# EAGLE board Stepper_motor (EAGLE 9.6.2)
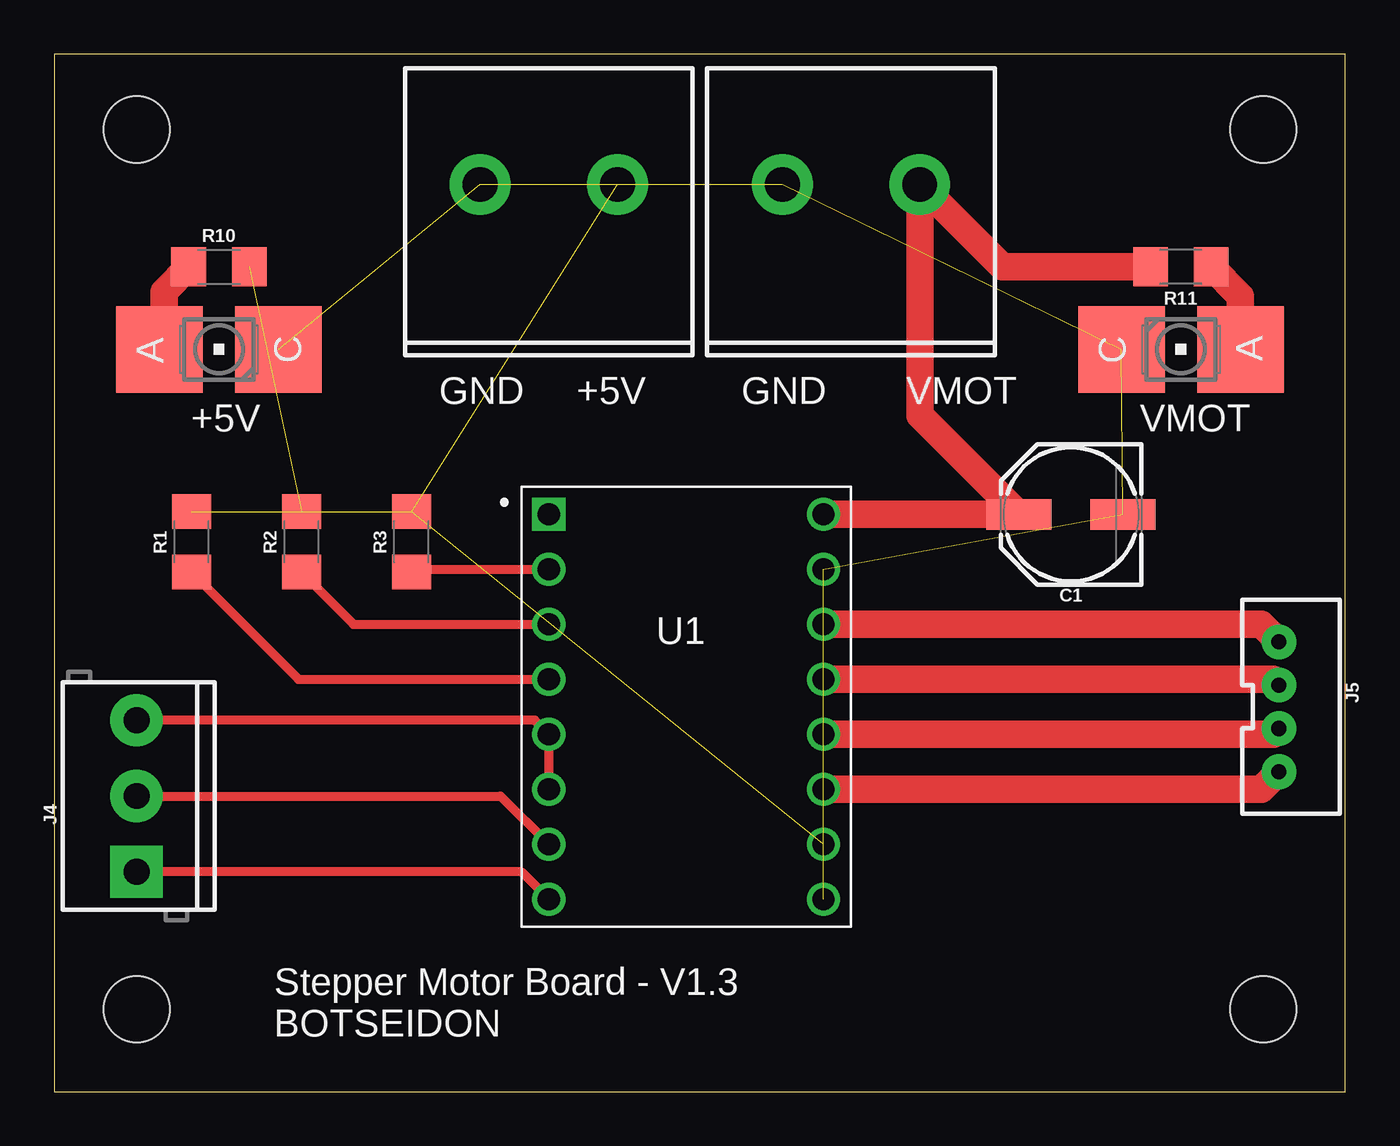
[diagram p0: board, top side]

Size 59.67 x 47.93 mm. Coordinates in mm from the lower left corner, seen from the top.
Outline: 0,0 59.67,0 59.67,47.93 0,47.93 0,0
Copper layers (1*16): Top 0.035mm / dielectric 1.5mm / Bottom 0.035mm
Design rules "default": minimum track width 6mil, minimum drill 0.35mm, track to track 6mil, track to pad 6mil, pad to pad 6mil, via to via 6mil, smd to smd 6mil, copper to edge 40mil, drill to drill 6mil, minimum pad ring 10mil, minimum via ring 8mil, stop-mask expansion 4mil, vias tented up to drill 0mil, thermal gap 10mil
Holes 3.05 mm at 3.81,3.81 55.88,3.81 55.88,44.45 3.81,44.45

## Footprints (pad centres in the part's own frame; a part is rotated, then mirrored left to right if it is on the bottom)
P-LCC-2 = smd 4 x 4: A 0,2.75; C 0,-2.75
PANASONIC_D = smd 3 x 1.4: + 2.4,0; - -2.4,0
1X02_6.35_SCREWTERM = drill 1.6 pad 2.8: P1 -3.175,0; P2 3.175,0
SCREWTERMINAL-3.5MM-3 = drill 1.2 pad 2.413 square: 1 0,0 | drill 1.2 pad 2.413: 2 3.5,0; 3 7,0
JST-4-PTH-VERT = drill 0.7 pad 1.6: 1 -3,-0.55; 2 -1,-0.55; 3 1,-0.55; 4 3,-0.55
1206 = smd 1.6 x 1.8: 1 -1.4,0; 2 1.4,0
MODULE_A4988_STEPPER_MOTOR_DRIVER_CARRIER = drill 1.02 square: 1 -6.35,8.89 | drill 1.02: 2 -6.35,6.35; 3 -6.35,3.81; 4 -6.35,1.27; 5 -6.35,-1.27; 6 -6.35,-3.81; 7 -6.35,-6.35; 8 -6.35,-8.89; 9 6.35,-8.89; 10 6.35,-6.35; 11 6.35,-3.81; 12 6.35,-1.27; 13 6.35,1.27; 14 6.35,3.81; 15 6.35,6.35; 16 6.35,8.89

## Placement (x,y rotation side)
+5V  [P-LCC-2]  7.62,34.29 90 top
C1  100uF  [PANASONIC_D]  46.99,26.67 180 top
J2  [1X02_6.35_SCREWTERM]  36.83,41.91 0 top
J4  [SCREWTERMINAL-3.5MM-3]  3.81,10.16 90 top
J5  [JST-4-PTH-VERT]  57.15,17.78 270 top
J7  [1X02_6.35_SCREWTERM]  22.86,41.91 0 top
R1  0  [1206]  6.35,25.4 90 top
R2  0  [1206]  11.43,25.4 90 top
R3  0  [1206]  16.51,25.4 90 top
R10  1k  [1206]  7.62,38.1 0 top
R11  2k  [1206]  52.07,38.1 180 top
U1  A4988_STEPPER_MOTOR_DRIVER_CARRIER  [MODULE_A4988_STEPPER_MOTOR_DRIVER_CARRIER]  29.21,17.78 0 top
VMOT  [P-LCC-2]  52.07,34.29 270 top

## Library data of the parts
+5V VMOT = adafruit
C1 = SparkFun-Capacitors; PROD_ID: CAP-12547
J2 J7 = SparkFun-Connectors; PROD_ID: CONN-15154
J4 = SparkFun-Connectors; PROD_ID: CONN-08288; SF_ID: PRT-08235
J5 = SparkFun-Connectors; PROD_ID: CONN-13251
R1-R3 R10 R11 = SparkFun-Resistors
U1 = A4988_STEPPER_MOTOR_DRIVER_CARRIER; AVAILABILITY: Unavailable; DESCRIPTION: Stepper Motor Driver; MF: Pololu; MP: A4988 STEPPER MOTOR DRIVER CARRIER; PACKAGE: None; PRICE: None

## Nets
5V: J7.P2 R1.2 R2.2 R3.2 R10.2 U1.10
12V: C1.+ J2.P2 R11.2 U1.16
GND: +5V.C C1.- J2.P1 J7.P1 U1.9 U1.15 VMOT.C
N$1: J5.4 U1.11
N$2: J5.3 U1.12
N$3: J5.2 U1.13
N$4: J5.1 U1.14
N$5: J4.2 U1.7
N$6: J4.1 U1.8
N$7: J4.3 U1.5 U1.6
N$8: R3.1 U1.2
N$9: R2.1 U1.3
N$10: R1.1 U1.4
N$11: +5V.A R10.1
N$12: R11.1 VMOT.A

## Tracks (layer width: path | path; a pad name or v marks a point on that pad's centre or on a via)
5V  (5 unrouted)
12V
  Top 1.27: R11.2 43.81,38.1 J2.P2 40.01,31.26 C1.+ U1.16
GND  (6 unrouted)
N$1
  Top 1.27: U1.11 55.79,13.97 J5.4
N$2
  Top 1.27: U1.12 56.33,16.51 J5.3
N$3
  Top 1.27: U1.13 56.33,19.05 J5.2
N$4
  Top 1.27: U1.14 55.79,21.59 J5.1
N$5
  Top 0.406: J4.2 20.63,13.66 U1.7
N$6
  Top 0.406: U1.8 21.59,10.16 J4.1
N$7
  Top 0.406: J4.3 22.21,17.16 U1.5 U1.6
N$8
  Top 0.406: 16.64,24.13 U1.2
  Top 0.813: R3.1 16.64,24.13
N$9
  Top 0.406: R2.1 13.84,21.59 U1.3
N$10
  Top 0.406: R1.1 11.3,19.05 U1.4
N$11
  Top 1.27: +5V.A 5.08,34.5 5.08,36.96 R10.1
N$12
  Top 1.27: R11.1 54.82,36.75 VMOT.A

## Text on the board
tPlace: GND | +5V | GND | Stepper Motor Board - V1.3 / BOTSEIDON
tNames: VMOT